# Altium PCB dctr_v1.0.pcbDoc
Units mil, origin at the board's own origin, x right, y up, seen from the top; angles counter-clockwise.
Board outline 7342.52 x 4157.48 mil, 2 copper layers (Top Layer, Bottom Layer); 47 components, 68 nets, 206 pads, 37 vias.
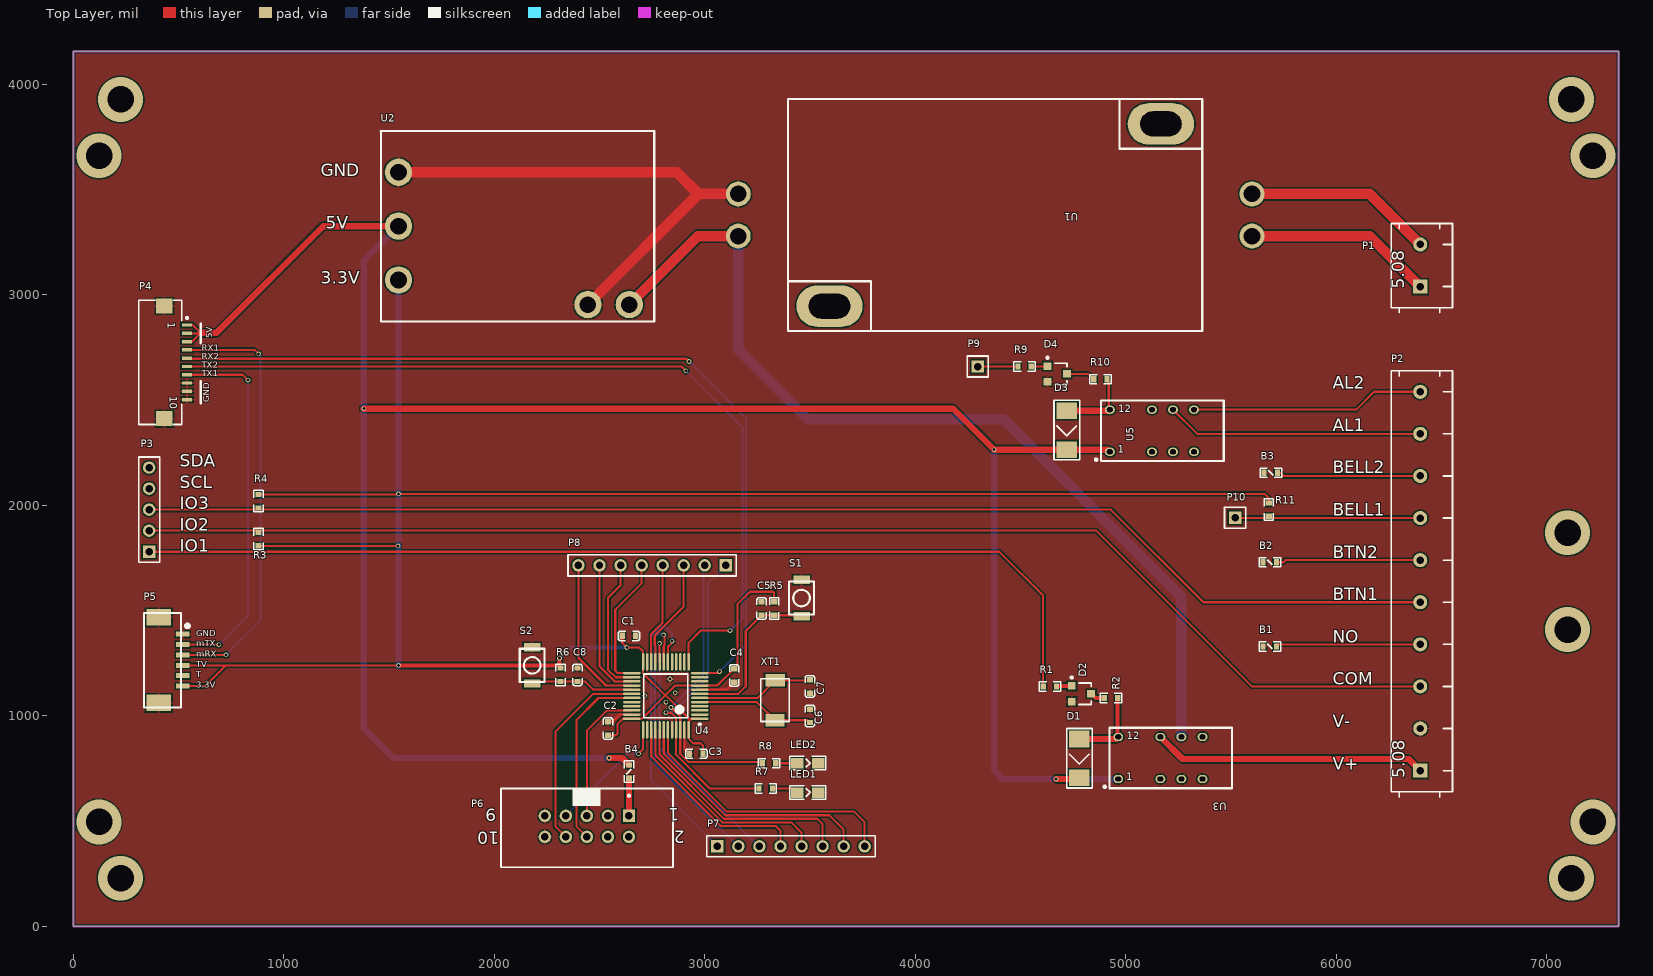
[diagram p0: Top Layer view]
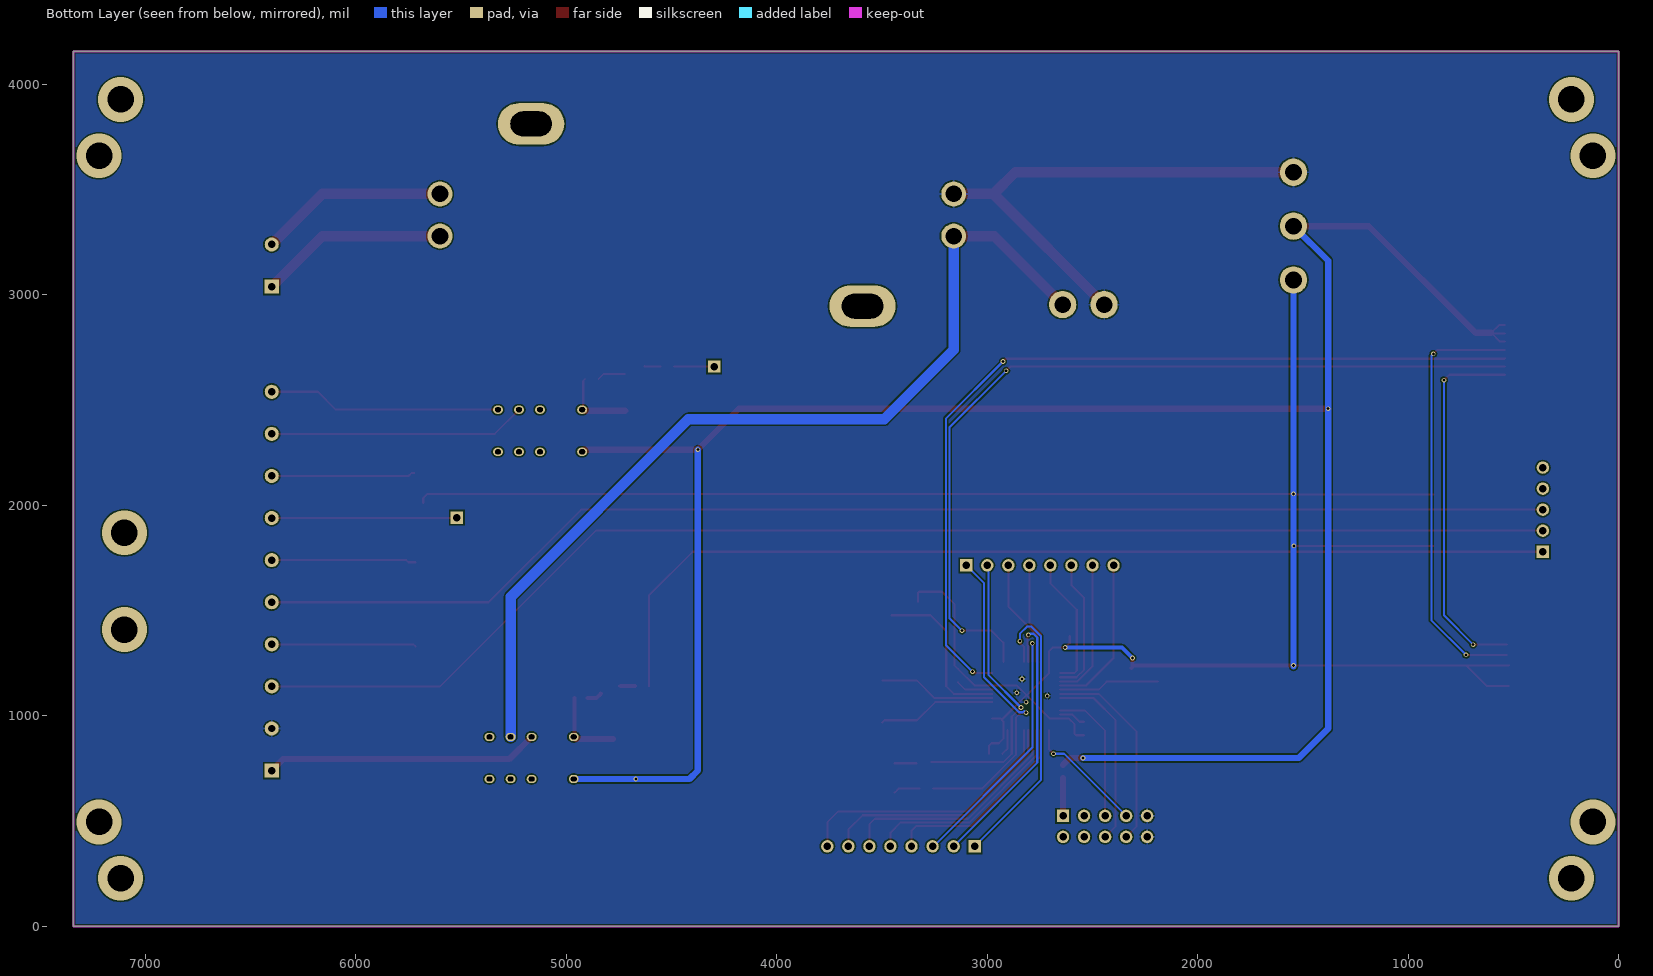
[diagram p1: Bottom Layer view, seen from below]

## Layer stack, top to bottom
Top Layer: signal copper 1.4
Dielectric: dielectric 12.6, FR-4, Dk 4.8
Bottom Layer: signal copper 1.4

## Board outline
0,0 7342.52,0 7342.52,4157.48 0,4157.48

## Design rules (kind name [scope] priority, off if disabled: settings)
Clearance [All] p1: gap=7
ComponentClearance [All] p1: gap=0 collisioncheckmode=3 verticalgap=0 showdistances=FALSE
HoleSize [All] p1: absolutevalues=TRUE maxlimit=1000 minlimit=1 maxpercent=80.000 minpercent=20.000
HoleToHoleClearance [All] p1: gap=7 allowstackedmicrovias=TRUE
MinimumSolderMaskSliver [All] p1: minsoldermaskwidth=0
PolygonConnect [All] p1: connectstyle=Relief reliefconductorwidth=10 reliefentries=4 polygonreliefangle="90 Angle"
RoutingVias [All] p1: holewidth=14 width=22 viastyle="Through Hole" minholewidth=14 minwidth=22 maxholewidth=280 maxwidth=500
SilkToSilkClearance [All] p1: silktosilkclearance=0
SilkscreenOverComponentPads [All] p1: minsilkscreentomaskgap=0
SolderMaskExpansion [All] p1: expansion=4
TestPointUsage [All] p1: valid=0 allowmultiple=FALSE
Testpoint [All] p1: side=15 testpointundercomponent=TRUE minsize=40 maxsize=100 preferedsize=60 minholesize=0 maxholesize=40 preferedholesize=32 testpointgrid=1 style=1023 order=0123456789
Width [All] p1: maxlimit=100 minlimit=7 preferedwidth=7
18 further rules are at their usual default settings.

## Components (designator, comment, footprint, x,y, rotation, side; value= is the part's Value field where it differs from the comment)
B1 "BEAD" 0603L 5685,1330 r180 top
B2 "BEAD" 0603L 5685,1730 r180 top
B3 "BEAD" 0603L 5690,2155 r180 top
B4 "BEAD" 0603L 2640,735 r90 top
C1 "104" 0603C 2640,1380 r180 top
C2 "104" 0603C 2540,940 r270 top
C3 "104" 0603C 2960,820 r180 top
C4 "104" 0603C 3140,1192 r90 top
C5 "104" 0603C 3270,1510 r90 top
C6 "22P" 0603C 3500,1000 r90 top
C7 "22P" 0603C 3500,1140 r270 top
C8 "104" 0603C 2395,1195 r270 top
D1 "D-S" DO-214AC(SMA) 4720,940 r270 top
D2 "AO3400A" SOT23A 4790,1105 r270 top
D3 "D-S" DO-214AC(SMA) 4660,2500 r270 top
D4 "AO3400A" SOT23A 4675,2625 r270 top
LED1 "LED" 0805D 3490,635 r0 top
LED2 "LED" 0805D 3490,775 r0 top
P1 "Header 2" KF128-5.08-2 6400,3140 r90 top
P2 "Header 10" KF128-5.08-10 6400,1640 r90 top
P3 "Header 5" HDR1X5 360,1780 r90 top
P4 "Header 12" FFC/SM1.0-2H10 540,2680 r270 top
P5 "Header 8" 1.25T-6P 520,1265 r270 top
P6 "Xdebug-V4" DC2.54-10 2440,475 r180 top
P7 "Header 8" HDR1X8 3060,380 r0 top
P8 "Header 8" HDR1X8 3100,1715 r180 top
P9 "header 1" HDR1 4300,2660 r90 top
P10 "header 1" HDR1 5520,1940 r0 top
R1 "10K" 0603R 4640,1140 r180 top
R2 "10K" 0603R 4930,1085 r180 top
R3 "10K" 0603R 880,1840 r270 top
R4 "10K" 0603R 880,2020 r90 top
R5 "10K" 0603R 3330,1510 r270 top
R6 "10K" 0603R 2315,1195 r270 top
R7 "1.5K" 0603R 3290,655 r0 top
R8 "1.5K" 0603R 3305,775 r0 top
R9 "10K" 0603R 4520,2660 r180 top
R10 "10K" 0603R 4880,2600 r180 top
R11 "10K" 0603R 5680,1980 r90 top
S1 "BUTTON" SW-3X4X2 3460,1560 r270 top
S2 "BUTTON" SW-3X4X2 2180,1240 r90 top
U1 "ACDC" ACDC 4380,3380 r180 top
U2 "DCDC" DCDC 2760,3780 r180 top
U3 "JDQ(G6S-2)" JDQ-G6S-2 5215,800 r0 top
U4 "STM32F103" LQFP48 2815,1095 r180 top
U5 "JDQ(G6S-2)" JDQ-G6S-2 5175,2355 r0 top
XT1 "8M" 5032 3335,1075 r90 top

## Footprints (in the part's own frame and the unit in brackets; to place one, negate y for a bottom-side part, rotate by r counter-clockwise, add the part's x,y. Pads: shape width x height; smd on the part's side, far side on the other; paste and mask are expansions set on the pad)
1.25T-6P [mm]
  rect 0.6x1.6 smd: 1(-3.125,0) 2(-1.875,0) 3(-0.625,0) 4(0.625,0) 5(1.875,0) 6(3.125,0)
  rect 2x3 smd: 7(-5.15,-2.9) 8(5.15,-2.9)
  silkscreen extent -5.7,-4.7 5.7,0.71
0603C [mil]
  rect 25x30 smd: 1(-32,0) 2(32,0)
  silkscreen extent -51,-22 51,22
0603L [mil]
  rect 25x30 smd: 1(-32,0) 2(32,0)
  silkscreen extent -51,-22 51,22
0603R [mil]
  rect 25x30 smd: 1(-32,0) 2(32,0)
  silkscreen extent -51,-22 51,22
0805D [mil]
  rect 60x49.21 smd: A(-50,0) K(50,0)
  silkscreen extent -85,-31 86,32
5032 [mm]
  rect 1.5x2.3 smd: 1(-2.438,0.025)
  rect 1.5x2.4 smd: 2(2.388,0)
  silkscreen extent -2.59,-1.7 2.59,1.75
ACDC [mm] "12V/1A"
  oval 8x5 hole 3 slot 5 at 0 deg: 0(-20,-11) 0(20,11)
  round 3 hole 2: 1(-31,2.54) 2(-31,-2.54) 3(31,-2.54) 4(31,2.54)
  silkscreen extent -25,-14 25,14
DC2.54-10 [mm] "Connector; IDC, PCB Transition - 2 Rows, Thru-Hole; 10 Position; Vertical; Pitch 2.54 mm; Body 18.00 x 6.1 x 7.45 mm (LxWxH)"
  rect 1.5x1.5 hole 0.9: 1(-5.08,-1.27)
  round 1.5 hole 0.9: 2(-5.08,1.27) 3(-2.54,-1.27) 4(-2.54,1.27) 5(0,-1.27) 6(0,1.27) 7(2.54,-1.27) 8(2.54,1.27) 9(5.08,-1.27) 10(5.08,1.27)
  silkscreen extent -10.39,-4.57 10.36,4.93
DCDC [mm]
  round 3.3 hole 2: 1(3,20.968) 2(8,20.968) 3(30.861,18) 4(30.861,11.5) 5(30.861,5)
  silkscreen extent 0,0 33.02,23
DO-214AC(SMA) [mm]
  rect 2x2.5 smd: A(1.27,1.524) K(5.969,1.524)
  silkscreen extent 0,0 7.19,3.1
FFC/SM1.0-2H10 [mm] "Connector; FH12 Series; 6 Position; 1.0mm Spaced Bottom Eccentric Contact"
  rect 0.4x1.25 smd: 1(-4.5,0) 2(-3.5,0) 3(-2.5,0) 4(-1.5,0) 5(-0.5,0) 6(0.5,0) 7(1.5,0) 8(2.5,0) 9(3.5,0) 10(4.5,0)
  rect 1.8x2 smd: 11(-6.8,-2.725) 12(6.8,-2.725)
  silkscreen extent -7.5,-5.82 7.5,0.13
HDR1 [mm]
  rect 1.5x1.5 hole 0.9: 1(0,0.051)
  silkscreen extent -1.27,-1.22 1.27,1.32
HDR1X5 [mm]
  rect 1.5x1.5 hole 0.9: 1(0,0)
  round 1.5 hole 0.9: 2(2.54,0) 3(5.08,0) 4(7.62,0) 5(10.16,0)
  silkscreen extent -1.27,-1.27 11.43,1.27
HDR1X8 [mm]
  rect 1.5x1.5 hole 0.9: 1(0,0)
  round 1.5 hole 0.9: 2(2.54,0) 3(5.08,0) 4(7.62,0) 5(10.16,0) 6(12.7,0) 7(15.24,0) 8(17.78,0)
  silkscreen extent -1.27,-1.27 19.05,1.27
JDQ-G6S-2 [mm] "继电器（G6S-2） 5VDC"
  oval 1.2x1 hole 0.6 slot 0.7 at 0 deg: 1(-6.35,-2.54) 3(-1.27,-2.54) 4(1.27,-2.54) 5(3.81,-2.54) 8(3.81,2.54) 9(1.27,2.54) 10(-1.27,2.54) 12(-6.35,2.54)
  silkscreen extent -8.14,-3.65 7.4,3.65
KF128-5.08-2 [mm]
  rect 1.7x1.7 hole 0.9: 1(-2.54,0)
  round 1.7 hole 0.9: 2(2.54,0)
  silkscreen extent -5.72,-3.9 5.08,3.5
KF128-5.08-10 [mm]
  rect 1.7x1.7 hole 0.9: 1(-22.86,0)
  round 1.7 hole 0.9: 2(-17.78,0) 3(-12.7,0) 4(-7.62,0) 5(-2.54,0) 6(2.54,0) 7(7.62,0) 8(12.7,0) 9(17.78,0) 10(22.86,0)
  silkscreen extent -26.06,-3.9 25.4,3.5
LQFP48 [mm]
  oval 2.1x0.3 smd: 1(-4.1,2.75) 2(-4.1,2.25) 3(-4.1,1.75) 4(-4.1,1.25) 5(-4.1,0.75) 6(-4.1,0.25) 7(-4.1,-0.25) 8(-4.1,-0.75) 9(-4.1,-1.25) 10(-4.1,-1.75) 11(-4.1,-2.25) 12(-4.1,-2.75) 25(4.1,-2.75) 26(4.1,-2.25) 27(4.1,-1.75) 28(4.1,-1.25) 29(4.1,-0.75) 30(4.1,-0.25) 31(4.1,0.25) 32(4.1,0.75) 33(4.1,1.25) 34(4.1,1.75) 35(4.1,2.25) 36(4.1,2.75)
  oval 0.3x2.1 smd: 13(-2.75,-4.1) 14(-2.25,-4.1) 15(-1.75,-4.1) 16(-1.25,-4.1) 17(-0.75,-4.1) 18(-0.25,-4.1) 19(0.25,-4.1) 20(0.75,-4.1) 21(1.25,-4.1) 22(1.75,-4.1) 23(2.25,-4.1) 24(2.75,-4.1) 37(2.75,4.1) 38(2.25,4.1) 39(1.75,4.1) 40(1.25,4.1) 41(0.75,4.1) 42(0.25,4.1) 43(-0.25,4.1) 44(-0.75,4.1) 45(-1.25,4.1) 46(-1.75,4.1) 47(-2.25,4.1) 48(-2.75,4.1)
  silkscreen extent -4.23,-2.65 2.65,3.57
SOT23A [mm] "SOT-23; 3 Leads; Body 3.0 x 2.5 mm, inc. leads (LxW max)"
  rect 0.9x0.95 smd: 1(-0.95,-1.175) 2(0.95,-1.175) 3(0,1.175)
  silkscreen extent -2.07,-1.3 1.3,1.18
SW-3X4X2 [mm] "3X4X2 小龟二脚开关按键"
  rect 1x2 smd: 1(-2.2,0) 2(2.2,0)
  silkscreen extent -2,-1.5 2,1.5

## Part data
B1 B2 B3 B4: "磁珠"
C1 C2 C3 C4 C5 C6 C7 C8: library part CAP, "普通小电容"
D1 D3: "肖特基二极管"
D2 D4: library part MOS-N, "NMOS"
P1: "Header, 2-Pin"
P2: "Header, 10-Pin"
P3: "Header, 5-Pin"
P4: "Header, 12-Pin"
P5 P7 P8: "Header, 8-Pin"
P6: "单片机端"
R1 R2 R3 R4 R5 R6 R7 R8 R9 R10 R11: library part RES, "普通电阻"
U1: library part ACDC12
U3 U5: "继电器（G6S-2 5VDC）"
XT1: library part XT, "晶振"

## Via types
v1: diameter 22, hole 14, Top Layer to Bottom Layer, 27 vias
v2: diameter 212.6, hole 125.98, Top Layer to Bottom Layer, 10 vias

## Nets (pads, with @x,y where several pads share a name; then routed paths per layer and width w, separated by ;. In a path a pad name is that pad's centre, name@x,y a point inside that pad or via, vN(x,y) a via of type N, cw(c..) or ccw(c..) an arc to the next point about the centre after c; other vN are vias at no path point)
AL1: P2.9 U5.9 | length 1222.6
  Top Layer w10: U5.9 5340,2340 P2.9
AL2: P2.10 U5.8 | length 1110.2
  Top Layer w10: U5.8 6095,2455 6180,2540 P2.10
BELL1: P2.7 P10.1 R11.1 | length 858
  Top Layer w10: P10.1@5542,1940 P2.7
BELL2: B3.1 P2.8 | length 684.2
  Top Layer w10: B3.1 5735,2155 5750,2140 P2.8
BTN1: P2.5 P3.3 R4.1 | length 6222.3
  Top Layer w10: P3.3 4930,1980 5370,1540 P2.5
BTN2: B2.1 P2.6 | length 687.1
  Top Layer w10: B2.1 5750,1730 5760,1740 P2.6
D3V3: C1.2 C2.2 C3.1 C4.2 P5.4 P5.6 R3.2 R4.2 R5.1 R6.1 R11.2 U2.3 U4.1 U4.9 U4.24 U4.36 U4.48 | length 11906.2
  Top Layer w10: P5.6 626.97,1141.97 725,1240 ; P5.4 520.39,1240 725,1240 ; R3.2 v1(1543,1808) ; R4.2 1542,2052 v1(1545,2055) 5660,2055 5680,2035 R11.2 ; v1(1545,1240) 725,1240 ; C2.2 2578,908 2585,915 2585,960 2611.73,986.73 U4.36 2653.77,986.92 2701.92,986.92 2812.5,1097.5 ; C1.2 2608,1347 v1(2630,1325) 2688.46,1325 2706.73,1306.73 U4.24 2706.92,1256.23 2706.92,1203.08 2812.5,1097.5 ; U4.1 2936.73,986.73 2930,980 ; C3.1 2992,858 2980,870 2945,870 2923.27,891.73 U4.48 2923.27,973.27 2930,980 ; R5.1 3330,1585 3325,1590 3215,1590 3155,1530 3155,1239 C4.2 3060.21,1144.21 U4.9 2859.21,1144.21 2812.5,1097.5 ; 2812.5,1097.5 2815.03,1097.5 2930,982.53 2930,980
  Top Layer w20: v1(1545,1240) 2302,1240 R6.1 ; R6.1@2310,1232 v1(2310,1275)
  Bottom Layer w20: v1(2310,1275) 2360,1325 v1(2630,1325)
  Bottom Layer w30: v1@1545,1235 v1(1545,1240) v1(1545,2055) U2.3
D5V: B4.2 D1.K D3.K P4.1 P4.2 P4.3 U2.4 U3.1 U5.1 | length 11012
  Top Layer w10: P4.3 563.43,2778.43 602.8,2817.8 P4.2 ; P4.1 567.83,2857.17 605,2820
  Top Layer w30: 605,2820 680,2820 1187.24,3327.24 U2.4 ; v1(1380,2460) 4180,2460 v1(4375,2265) D3.K U5.1@4915,2265 ; v1(2545,800) 2607,800 B4.2 ; v1(4670,700) D1.K@4775,700
  Bottom Layer w30: U2.4 1380,3162.24 v1(1380,2460) 1380,940 1520,800 v1(2545,800) ; v1(4375,2265) 4375,740 4415,700 v1(4670,700) U3.1
D12V: U1.4 U2.1 U3.9 | length 4449.4
  Top Layer w50: U2.1 2967.4,3280 U1.4
  Bottom Layer w50: U1.4 3159.53,2740.47 3490,2410 4420,2410 5265,1565 U3.9
GND: B1.2 B2.2 B3.2 C1.1 C2.1 C3.2 C4.1 C5.2 C6.2 C7.2 C8.1 D2.2 D4.2 LED1.K LED2.K P2.2 P4.8 P4.9 P4.10 P4.11 P4.12 P5.1 P5.7 P5.8 P6.9 P6.10 S1.1 S2.2 U1.3 U2.2 U2.5 U4.8 U4.23 U4.35 U4.44 U4.47 | length 2830.3
  Top Layer w10: C2.1 2562,972 2596.42,1006.42 U4.35 ; U4.47 2903.58,844.42 C3.2 ; U4.8 3104.53,1124.53 C4.1
  Top Layer w50: U2.5 2867.4,3583.15 2970.55,3480 ; U2.2 2970.55,3480 ; U1.3 2970.55,3480
  other v1: 2815,1065 2715,1095 2860,1110 2835,1175
IO1: P3.1 R1.2 | length 4766.2
  Top Layer w10: P3.1 4400,1780 4608,1572 R1.2
IO2: P2.3 P3.2 R3.1 | length 6346.5
  Top Layer w10: P3.2 4860,1880 5600,1140 P2.3
LOCK_FEED2: B1.1 P2.4 | length 687.1
  Top Layer w10: B1.1 5727,1340 P2.4
LOCK_V+: P2.1 U3.10 | length 1301.3
  Top Layer w30: U3.10 5270,795 6345,795 P2.1
NetB4_1: B4.1 P6.1 | length 178
  Top Layer w30: P6.1 B4.1
NetC6_1: C6.1 U4.5 XT1.1 | length 564
  Top Layer w10: U4.5 3247.53,1065.47 XT1.1 3489,979 C6.1
NetC7_1: C7.1 U4.6 XT1.2 | length 555.3
  Top Layer w10: U4.6 3251.16,1085.16 XT1.2 C7.1@3497,1169
NetD1_A: D1.A R2.1 U3.12 | length 371.1
  Top Layer w20: U3.12@4962,903 R2.1
  Top Layer w30: D1.A 4955,890 U3.12
NetD2_1: D2.1 R1.1 | length 69.3
  Top Layer w20: R1.1@4674.4,1142.4 D2.1
NetD2_3: D2.3 R2.2 | length 70
  Top Layer w20: D2.3 4856.26,1085 R2.2
NetD3_A: D3.A R10.1 U5.12 | length 350.4
  Top Layer w10: R10.1 4920,2592 U5.12@4920,2460
  Top Layer w30: D3.A 4920,2450 U5.12
NetD4_1: D4.1 R9.1 | length 77.7
  Top Layer w10: R9.1 4626.34,2660 D4.1
NetD4_3: D4.3 R10.2 | length 137.1
  Top Layer w10: D4.3 4823,2625 R10.2
NetLED1_A: LED1.A R7.2 | length 126.3
  Top Layer w10: R7.2 3420,655 LED1.A
NetLED2_A: LED2.A R8.2 | length 103
  Top Layer w10: R8.2 LED2.A
NetP1_1: P1.1 U1.1 | length 898.9
  Top Layer w50: U1.1 6160,3280 P1.1
NetP1_2: P1.2 U1.2 | length 898.9
  Top Layer w50: U1.2 6160,3480 P1.2
NetP9_1: P9.1 R9.2 | length 190
  Top Layer w10: P9.1 R9.2
PA0: U4.10
PA1: U4.11
PA2: P4.5 U4.12 | length 4127.1
  Top Layer w10: P4.5 542.68,2697 2912,2697 v1(2925,2684) ; U4.12 3063.27,1203.27 v1(3070,1210)
  Bottom Layer w10: v1(2925,2684) 3197,2412 3197,1337 v1(3070,1210)
PA3: P4.6 U4.13 | length 4062.2
  Top Layer w10: P4.6 2889.69,2660.31 v1(2910,2640) ; U4.13 2923.27,1348.27 2980,1405 v1(3120,1405)
  Bottom Layer w10: v1(2910,2640) 3180,2370 3180,1465 v1(3120,1405)
PA4: U4.14
PA5: U4.15
PA6: U4.16
PA7: U4.17
PA8: C8.2 R6.2 S2.1 U4.29 | length 479.9
  Top Layer w10: S2.1@2189.61,1163 R6.2 C8.2 2432,1163 2470.47,1124.53 U4.29
PA9: P6.8 U4.30 | length 958.8
  Top Layer w10: P6.8 2290,475 2290,925 2469.84,1104.84 U4.30
PA10: P6.6 U4.31 | length 882.9
  Top Layer w10: P6.6 2390,475 2390,980 2495,1085 2653.43,1085 U4.31
PA11: U4.32
PA12: U4.33
PA13: P6.5 U4.34 | length 658.4
  Top Layer w10: P6.5 2440,930 2536.1,1026.1 U4.34
PA14: P6.7 U4.37 | length 589.8
  Top Layer w10: v1(2685,820) 2706.73,841.73 U4.37
  Bottom Layer w10: P6.7 2635,820 v1(2685,820)
PA15: U4.38
PB0: P7.1 U4.18 | length 1404.6
  Top Layer w10: U4.18 2824.84,1327.33 2845,1347.49 v1(2845,1355)
  Bottom Layer w10: v1(2845,1355) 2845,1390 2810,1425 2790.96,1425 2745.47,1379.51 2745.47,694.53 P7.1
PB1: P7.2 U4.19 | length 1340.4
  Top Layer w10: v1(2805,1385) 2808.47,1381.53 2808.47,1335 2805.16,1331.69 U4.19
  Bottom Layer w10: v1(2805,1385) 2800,1390 2780,1390 2762.47,1372.47 2762.47,777.53 P7.2
PB2: P7.3 U4.20 | length 1247.1
  Top Layer w10: U4.20 v1(2785.47,1344.53)
  Bottom Layer w10: v1(2785.47,1344.53) 2785.47,849.53 P7.3@3255,380
PB3: P7.4 U4.39 | length 960.9
  Top Layer w10: U4.39 2746.1,807.73 3076.83,477 3338,477 3360,455 P7.4
PB4: P7.5 U4.40 | length 1032.8
  Top Layer w10: U4.40 2765.79,812.09 3083.88,494 3411,494 3460,445 P7.5
PB5: P7.6 U4.41 | length 1134
  Top Layer w10: U4.41 2785.47,816.44 3090.92,511 3534,511 3560,485 P7.6
PB6: P7.7 U4.42 | length 1197.1
  Top Layer w10: U4.42 2805.16,820.8 3097.96,528 3592,528 3660,460 P7.7
PB7: P7.8 U4.43 | length 1295.3
  Top Layer w10: U4.43 2824.84,825.16 3105,545 3710,545 3760,495 P7.8
PB8: P8.1 R7.1 U4.45 | length 1537.6
  Top Layer w10: v1(2815,1015) 2840,1015 2864.21,990.79 U4.45 2864.21,815.28 3024.49,655 R7.1
  Bottom Layer w10: v1(2815,1015) 2823.74,1023.74 2830.47,1017 2849.53,1017 3015,1182.47 3015,1630 P8.1
PB9: P8.2 R8.1 U4.46 | length 1380.3
  Top Layer w10: v1(2840,1040) 2883.9,996.1 U4.46 2883.9,819.63 2923.53,780 R8.1@3268,780
  Bottom Layer w10: v1(2840,1040) 2995,1195 2995,1710 P8.2
PB10: P8.3 U4.21 | length 516.9
  Top Layer w10: U4.21 2765.79,1331.69 2762.47,1335 2762.47,1381.96 2900,1519.49 P8.3
PB11: P8.4 U4.22 | length 481.4
  Top Layer w10: U4.22 2745.47,1257.05 2745.47,1389 2800,1443.53 P8.4
PB12: P8.5 U4.25 | length 635.2
  Top Layer w10: U4.25 2586.73,1203.27 2575,1215 2575,1505 2700,1630 P8.5
PB13: P8.6 U4.26 | length 648.5
  Top Layer w10: P8.6 2600,1620 2540,1560 2540,1220 2576.42,1183.58 U4.26
PB14: P8.7 U4.27 | length 663
  Top Layer w10: P8.7 2500,1235 2571.1,1163.9 U4.27
PB15: P8.8 U4.28 | length 747.8
  Top Layer w10: P8.8 2400,1275 2530.79,1144.21 U4.28
PC13: U4.2
PC14: U4.3
PC15: U4.4
RST: C5.1 R5.2 S1.2 U4.7 | length 787.6
  Top Layer w10: U4.7 3159.84,1104.84 3195,1140 3195,1403 C5.1 R5.2 S1.2@3455.39,1478
RX1: P4.4 P5.3 | length 2045.5
  Top Layer w10: P5.3@530,1289.61 724.61,1289.61 v1(725,1290) ; P4.4 860.94,2739.06 v1(880,2720)
  Bottom Layer w10: v1(725,1290) 890,1455 890,2710 v1(880,2720)
SCL: P3.4
SDA: P3.5
TX1: P4.7 P5.2 | length 1775.6
  Top Layer w10: P5.2@530,1338.82 v1(691.18,1338.82) ; P4.7 804.06,2620.94 v1(830,2595)
  Bottom Layer w10: v1(691.18,1338.82) 830,1477.64 v1(830,2595)
pads on no net: P5.5 P6.2 P6.3 P6.4 U1.0 U3.3 U3.4 U3.5 U3.8 U5.3 U5.4 U5.5 U5.10
copper on no net:
  other v2: 224.41,228.35 7118.11,228.35 122.05,496.06 7220.47,496.06 7100,1410 7100,1870 122.05,3661.42 7220.47,3661.42 224.41,3929.13 7118.11,3929.13

## Polygon pours and split planes (outlines as drawn)
GND on Top Layer "Keep-Out Layer-No Net" (solid, remove dead copper): 7342.52,4157.48 7342.52,0 0,0 0,4157.48
GND on Bottom Layer "Keep-Out Layer-No Net" (solid, remove dead copper): 7342.52,4157.48 7342.52,0 0,0 0,4157.48

## Keep-outs
Keep-Out Layer:
  the board outline again, w10

## Silkscreen, mask and mechanical layers (free items; w line width, h text height)
Top Overlay:
  lines w10: 605,2485 605,2590 ; 605,2770 605,2865
  text "GND" at 1175,3545 h100
  text "5V" at 1200,3295 h100
  text "3.3V" at 1175,3035 h100
  text "5V" at 670,2795 h50 r90
  text "RX1" at 610,2725 h50
  text "RX2" at 610,2685 h50
  text "TX2" at 610,2645 h50
  text "TX1" at 610,2605 h50
  text "AL2" at 5985,2535 h100
  text "GND" at 655,2490 h50 r90
  text "AL1" at 5985,2333.89 h100
  text "SDA" at 505,2165 h100
  text "BELL2" at 5985,2132.78 h100
  text "SCL" at 505,2063.75 h100
  text "IO3" at 505,1962.5 h100
  text "BELL1" at 5985,1931.67 h100
  text "IO2" at 505,1861.25 h100
  text "IO1" at 505,1760 h100
  text "BTN2" at 5985,1730.56 h100
  text "BTN1" at 5985,1529.44 h100
  text "GND" at 585,1370 h50
  text "NO" at 5985,1329.41 h100
  text "mTX" at 585,1320.46 h50
  text "mRX" at 585,1271.46 h50
  text "TV" at 585,1222.46 h50
  text "T" at 585,1173.46 h50
  text "COM" at 5985,1128.3 h100
  text "3.3V" at 585,1125 h50
  text "V-" at 5985.1,926.11 h100
  text "V+" at 5985.1,725 h100

## Dimensions
0,0 to 7342.52,0 on Top Overlay
0,0 to 0,4157.48 on Top Overlay

## Text inside footprints (layer, text, board x,y; h text height)
P1: Top Overlay "5.08" at 6342.91,3029.76 h100 r90
P2: Top Overlay "5.08" at 6344.88,702.99 h100 r90
P4: Top Overlay "1" at 437.31,2870.01 h59.06 r270; Top Overlay "10" at 446.5,2518.58 h59.06 r270
P6: Top Overlay "9" at 2010,558 h59.06 r180; Top Overlay "10" at 2024,450 h59.06 r180; Top Overlay "1" at 2880,561 h59.06 r180; Top Overlay "2" at 2906,454 h59.06 r180
U3: Top Overlay "12" at 5005,876 h60; Top Overlay "1" at 5002,683 h60
U5: Top Overlay "12" at 4965,2431 h60; Top Overlay "1" at 4962,2238 h60